# EAGLE board Dual_Drive_4 (EAGLE 9.6.2)
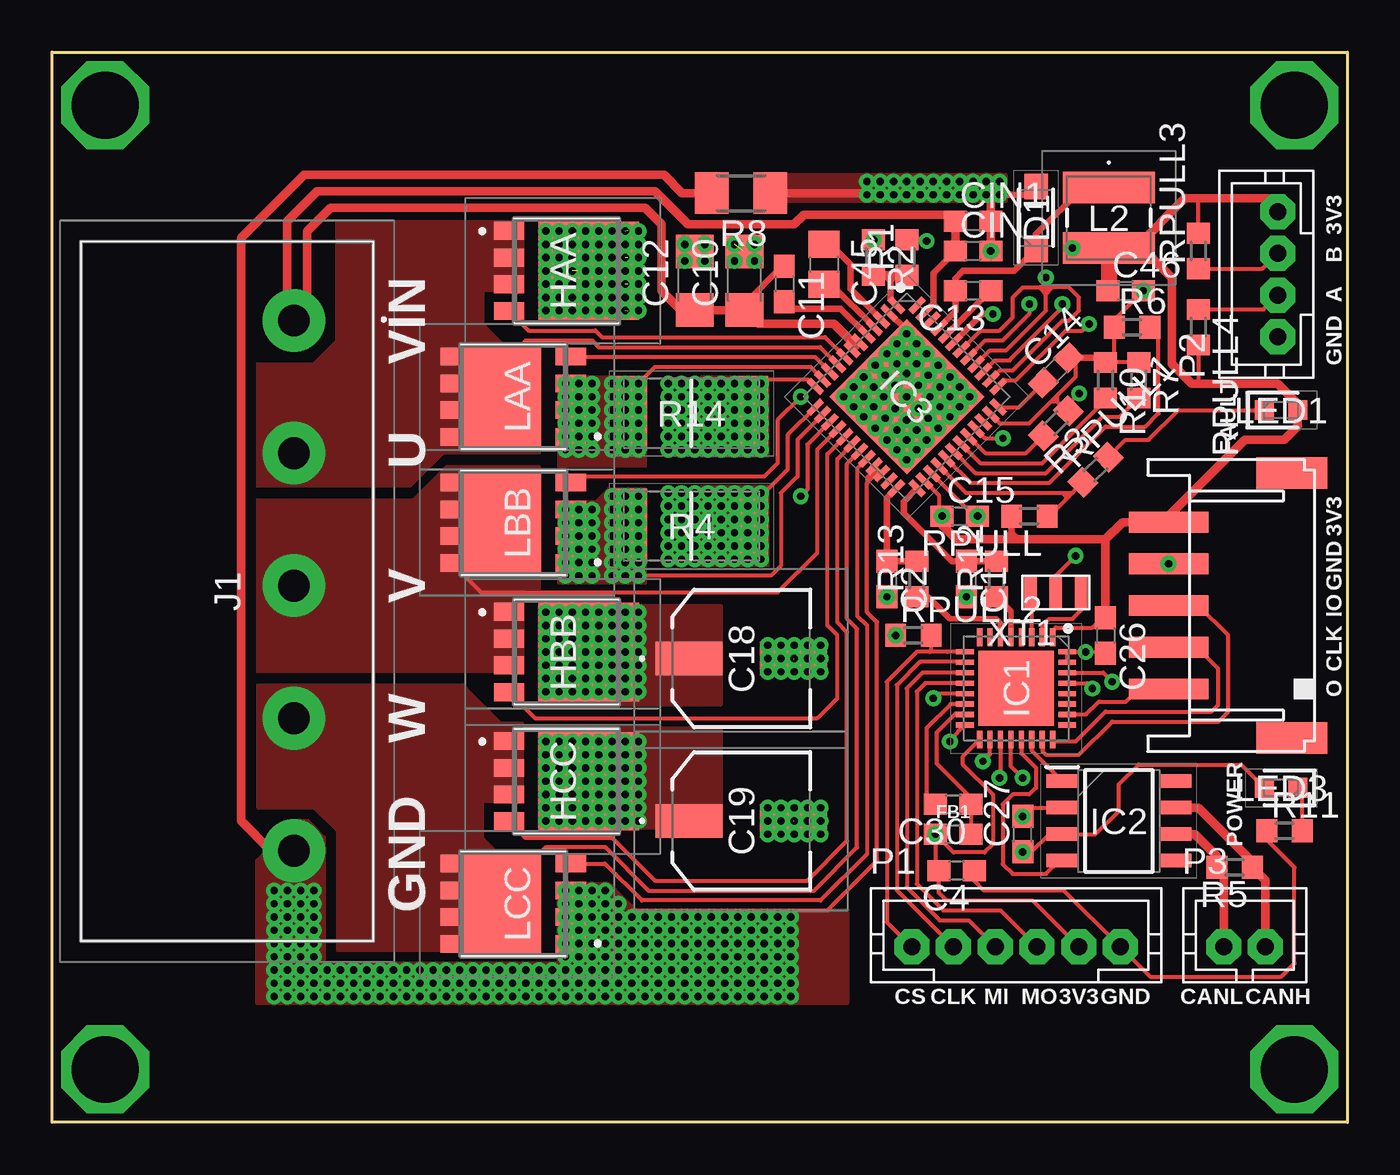
[diagram p0: board, top side]
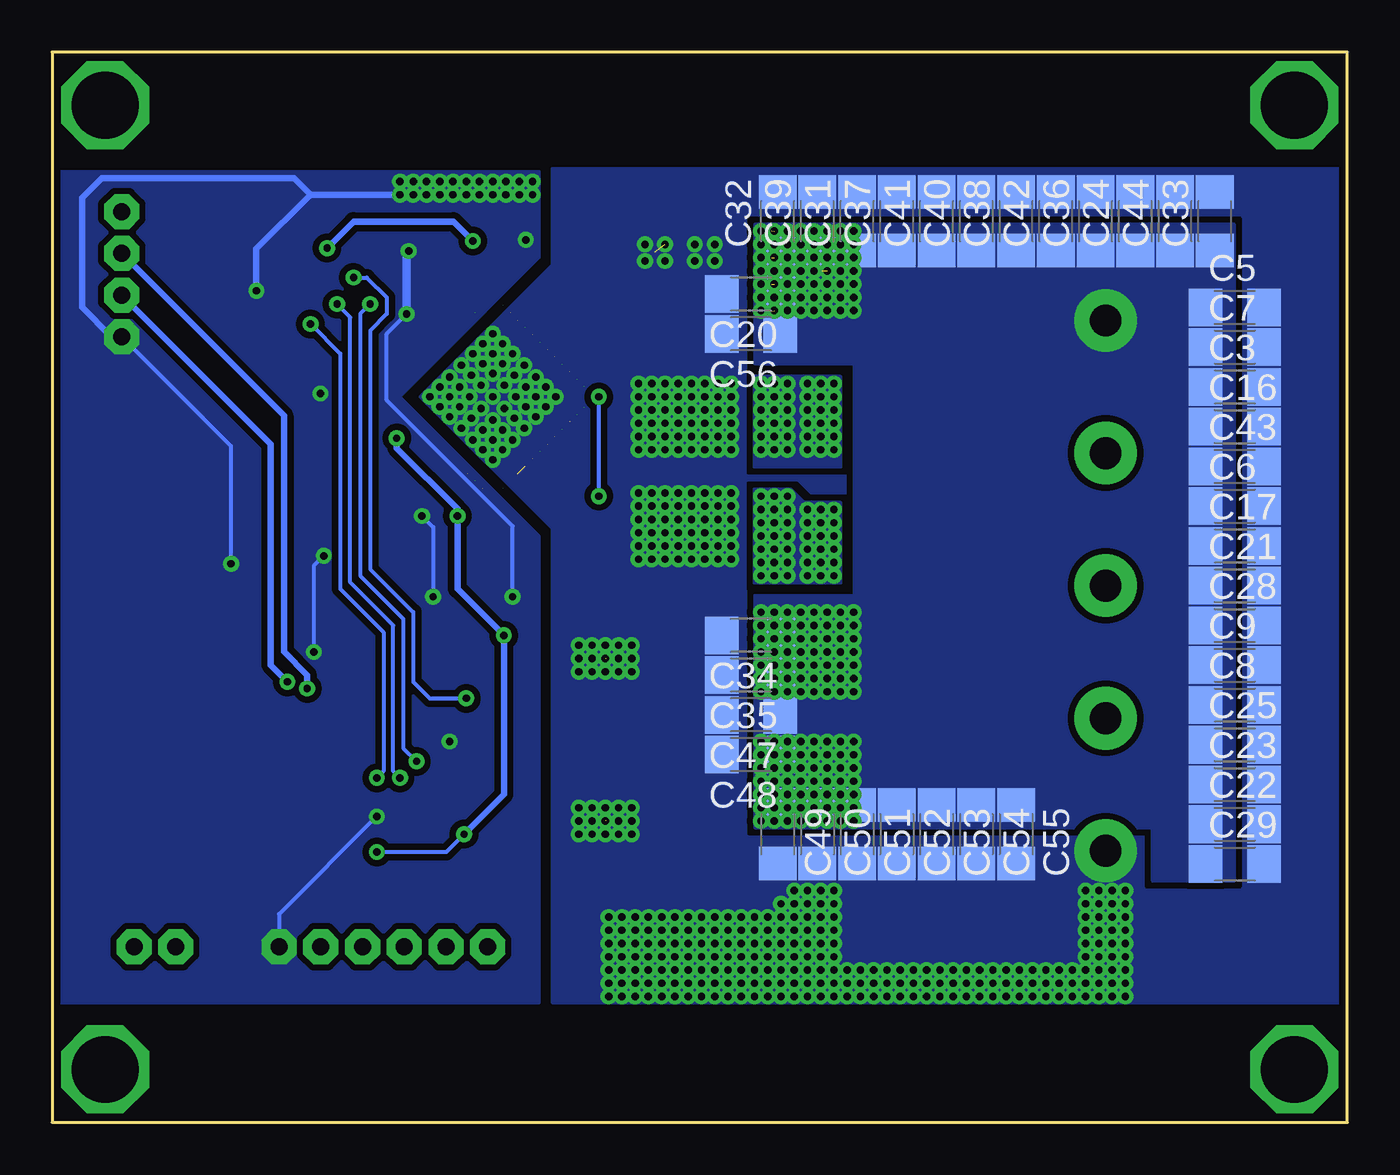
[diagram p1: board, bottom side, seen from below]

Size 62.07 x 51.28 mm. Coordinates in mm from the lower left corner, seen from the top.
Outline: 62.07,0 0,0 0,51.28 62.07,51.28 62.07,0
Copper layers (1*16): Top 0.035mm / dielectric 1.5mm / Bottom 0.035mm
Design rules "default *": minimum track width 6mil, minimum drill 0.35mm, track to track 6mil, track to pad 6mil, pad to pad 6mil, via to via 6mil, smd to smd 6mil, copper to edge 6mil, drill to drill 6mil, minimum pad ring 10mil, minimum via ring 8mil, stop-mask expansion 4mil, vias tented up to drill 15mil, thermal gap 10mil

## Footprints (pad centres in the part's own frame; a part is rotated, then mirrored left to right if it is on the bottom)
C0603 = smd 1.1 x 1: 1 -0.85,0; 2 0.85,0
C1206 = smd 1.6 x 1.8: 1 -1.4,0; 2 1.4,0
EEEHP1H4R7P = smd 1.6 x 3.2: 1 0,-2.5; 2 0,2.5
C0805 = smd 1.3 x 1.5: 1 -0.95,0; 2 0.95,0
SODFL3616X98N = smd 1.24 x 1.12: 1 -1.5,0; 2 1.5,0
0603 = smd 1.1 x 1: 1 -0.85,0; 2 0.85,0
TPHR9003NLL1Q = smd 0.85 x 1.45: 1 -1.925,-2.309; 2 -0.635,-2.309; 3 0.635,-2.309; 4 1.925,-2.309 | smd 0.85 x 1.05: 5 1.925,3.391; 6 0.635,3.391; 7 -0.635,3.391; 8 -1.925,3.391 | smd 4.7 x 3.75: 9 0,0.981
QFN50P500X500X60-33N = smd 0.85 x 0.25: 1 -2.45,1.75; 2 -2.45,1.25; 3 -2.45,0.75; 4 -2.45,0.25; 5 -2.45,-0.25; 6 -2.45,-0.75; 7 -2.45,-1.25; 8 -2.45,-1.75; 17 2.45,-1.75; 18 2.45,-1.25; 19 2.45,-0.75; 20 2.45,-0.25; 21 2.45,0.25; 22 2.45,0.75; 23 2.45,1.25; 24 2.45,1.75 | smd 0.25 x 0.85: 9 -1.75,-2.45; 10 -1.25,-2.45; 11 -0.75,-2.45; 12 -0.25,-2.45; 13 0.25,-2.45; 14 0.75,-2.45; 15 1.25,-2.45; 16 1.75,-2.45; 25 1.75,2.45; 26 1.25,2.45; 27 0.75,2.45; 28 0.25,2.45; 29 -0.25,2.45; 30 -0.75,2.45; 31 -1.25,2.45; 32 -1.75,2.45 | smd 3.6 x 3.6: 33 0,0
SOIC127P600X175-8N = smd 1.528 x 0.65: 1 -2.711,1.905; 2 -2.711,0.635; 3 -2.711,-0.635; 4 -2.711,-1.905; 5 2.711,-1.905; 6 2.711,-0.635; 7 2.711,0.635; 8 2.711,1.905
QFN50P700X700X100-49N = smd 0.9 x 0.3: 1 -3.45,2.75; 2 -3.45,2.25; 3 -3.45,1.75; 4 -3.45,1.25; 5 -3.45,0.75; 6 -3.45,0.25; 7 -3.45,-0.25; 8 -3.45,-0.75; 9 -3.45,-1.25; 10 -3.45,-1.75; 11 -3.45,-2.25; 12 -3.45,-2.75; 25 3.45,-2.75; 26 3.45,-2.25; 27 3.45,-1.75; 28 3.45,-1.25; 29 3.45,-0.75; 30 3.45,-0.25; 31 3.45,0.25; 32 3.45,0.75; 33 3.45,1.25; 34 3.45,1.75; 35 3.45,2.25; 36 3.45,2.75 | smd 0.3 x 0.9: 13 -2.75,-3.45; 14 -2.25,-3.45; 15 -1.75,-3.45; 16 -1.25,-3.45; 17 -0.75,-3.45; 18 -0.25,-3.45; 19 0.25,-3.45; 20 0.75,-3.45; 21 1.25,-3.45; 22 1.75,-3.45; 23 2.25,-3.45; 24 2.75,-3.45; 37 2.75,3.45; 38 2.25,3.45; 39 1.75,3.45; 40 1.25,3.45; 41 0.75,3.45; 42 0.25,3.45; 43 -0.25,3.45; 44 -0.75,3.45; 45 -1.25,3.45; 46 -1.75,3.45; 47 -2.25,3.45; 48 -2.75,3.45 | smd 5.25 x 5.25: 49 0,0
386006605 = drill 1.524 pad 3: 1 0,0; 2 6.35,0; 3 12.7,0; 4 19.05,0; 5 25.4,0
SRN4030HA101M = smd 4.4 x 1.5: 1 0,-1.45; 2 0,1.45
LEDC1608X55N = smd 0.9 x 0.95: 1 -0.8,0; 2 0.8,0
JST-PH6 = drill 0.813 pad 1.676 octagon: 1 5,0; 2 3,0; 3 1,0; 4 -1,0; 5 -3,0; 6 -5,0
JST-PH4 = drill 0.813 pad 1.676 octagon: 1 3,0; 2 1,0; 3 -1,0; 4 -3,0
JST-PH2 = drill 0.813 pad 1.676 octagon: 1 1,0; 2 -1,0
R0603 = smd 1 x 1.1: 1 -0.85,0; 2 0.85,0
RESC6434X90N = smd 1.55 x 3.55: 1 -2.9,0; 2 2.9,0
M1206 = smd 1.6 x 2: 1 -1.4,0; 2 1.4,0
CON-JST-PH2.0-5PIN-SMD = smd 1 x 3.8: 1 4,0; 2 2,0; 3 0,0; 4 -2,0; 5 -4,0 | smd 1.5 x 3.4: NC1 -6.35,5.9; NC2 6.35,5.9
CSTCE = smd 0.6 x 1.6: 1 -1.2,0; 2 0,0; 3 1.2,0

## Placement (x,y rotation side)
C1  3.3nF  [C0603]  43.81,26.04 270 top
C2  3.3nF  [C0603]  40.01,26.04 270 top
C3  10uF  [C1206]  5.4,35.24 0 bottom
C4  22uF  [C0603]  43.34,12.06 180 top
C5  10uF  [C1206]  5.4,39.05 0 bottom
C6  10uF  [C1206]  5.4,29.53 0 bottom
C7  10uF  [C1206]  5.4,37.15 0 bottom
C8  10uF  [C1206]  5.4,20 0 bottom
C9  10uF  [C1206]  5.4,21.91 0 bottom
C10  0.1uF  [C1206]  33.18,40.32 90 top
C11  1uF  [C0603]  35.08,40.16 270 top
C12  10uF  [C1206]  30.8,40.32 90 top
C13  0.1uF  [C0603]  44.13,39.85 180 top
C14  1uF  [C0603]  48.1,36.04 45 top
C15  0.1uF  [C0603]  43.5,29.05 0 top
C16  10uF  [C1206]  5.4,33.34 0 bottom
C17  10uF  [C1206]  5.4,27.62 0 bottom
C18  EEE-FTH101XAL  [EEEHP1H4R7P]  33.02,22.22 270 top
C19  EEE-FTH101XAL  [EEEHP1H4R7P]  33.02,14.45 270 top
C20  10uF  [C1206]  28.57,39.69 180 bottom
C21  10uF  [C1206]  5.4,25.72 0 bottom
C22  10uF  [C1206]  5.4,14.29 0 bottom
C23  10uF  [C1206]  5.4,16.19 0 bottom
C24  10uF  [C1206]  10.16,43.18 90 bottom
C25  10uF  [C1206]  5.4,18.1 0 bottom
C26  0.1uF  [C0603]  50.48,23.34 270 top
C27  0.1uF  [C0603]  46.51,13.81 90 top
C28  10uF  [C1206]  5.4,23.81 0 bottom
C29  10uF  [C1206]  5.4,12.38 0 bottom
C30  0.1uF  [C0603]  43.18,15.24 180 top
C31  10uF  [C1206]  23.5,43.18 90 bottom
C32  10uF  [C1206]  27.3,43.18 90 bottom
C33  10uF  [C1206]  6.35,43.18 90 bottom
C34  10uF  [C1206]  28.57,23.34 180 bottom
C35  10uF  [C1206]  28.57,21.43 180 bottom
C36  10uF  [C1206]  12.06,43.18 90 bottom
C37  10uF  [C1206]  21.59,43.18 90 bottom
C38  10uF  [C1206]  15.88,43.18 90 bottom
C39  10uF  [C1206]  25.4,43.18 90 bottom
C40  10uF  [C1206]  17.78,43.18 90 bottom
C41  10uF  [C1206]  19.68,43.18 90 bottom
C42  10uF  [C1206]  13.97,43.18 90 bottom
C43  10uF  [C1206]  5.4,31.43 0 bottom
C44  10uF  [C1206]  8.26,43.18 90 bottom
C45  47nF  [C0805]  36.99,41.12 270 top
C46  22uF  [C0603]  51.44,39.85 0 top
C47  10uF  [C1206]  28.57,19.53 180 bottom
C48  10uF  [C1206]  28.57,17.62 180 bottom
C49  10uF  [C1206]  27.3,13.81 270 bottom
C50  10uF  [C1206]  25.4,13.81 270 bottom
C51  10uF  [C1206]  23.5,13.81 270 bottom
C52  10uF  [C1206]  21.59,13.81 270 bottom
C53  10uF  [C1206]  19.68,13.81 270 bottom
C54  10uF  [C1206]  17.78,13.81 270 bottom
C55  10uF  [C1206]  15.88,13.81 270 bottom
C56  10uF  [C1206]  28.57,37.78 180 bottom
CIN  1uF  [C0603]  44.13,41.75 0 top
CIN1  1uF  [C0603]  44.13,43.18 0 top
D1  MBR1H100SFT3G  [SODFL3616X98N]  47.15,43.34 90 top
FB1  600r  [0603]  43.18,13.81 0 top
HAA  TPH2R506PL,L1Q  [TPHR9003NLL1Q]  24.21,40.8 270 top
HBB  TPH2R506PL,L1Q  [TPHR9003NLL1Q]  24.21,22.54 270 top
HCC  TPH2R506PL,L1Q  [TPHR9003NLL1Q]  24.21,16.35 270 top
IC1  STM32G491KEU6  [QFN50P500X500X60-33N]  46.2,20.8 270 top
IC2  TCAN332GD  [SOIC127P600X175-8N]  51.12,14.45 0 top
IC3  DRV8323RHRGZR  [QFN50P700X700X100-49N]  40.96,34.77 315 top
J1  38600-6605  [386006605]  11.59,38.42 270 top
L2  SRN4030HA-101M  [SRN4030HA101M]  50.64,43.34 180 top
LAA  TPH2R506PL,L1Q  [TPHR9003NLL1Q]  22.54,34.77 90 top
LBB  TPH2R506PL,L1Q  [TPHR9003NLL1Q]  22.54,28.73 90 top
LCC  TPH2R506PL,L1Q  [TPHR9003NLL1Q]  22.54,10.48 90 top
LED1  LTST-C191KRKT  [LEDC1608X55N]  58.9,34.13 0 top
LED3  LTST-C191KRKT  [LEDC1608X55N]  58.9,16.03 180 top
P1  [JST-PH6]  46.2,8.41 0 top
P2  [JST-PH4]  58.74,40.64 90 top
P3  [JST-PH2]  57.15,8.41 0 top
R1  33k  [R0603]  40.96,41.43 90 top
R2  10k  [R0603]  39.37,41.43 270 top
R3  47k  [R0603]  48.1,33.5 225 top
R4  0.01  [RESC6434X90N]  30.64,28.57 180 top
R5  60  [R0603]  56.67,12.22 180 top
R6  47k  [R0603]  51.75,38.1 0 top
R7  75k  [R0603]  52.07,35.56 270 top
R8  0  [M1206]  33.02,44.53 180 top
R10  75k  [R0603]  50.48,35.56 270 top
R11  510  [R0603]  59.05,13.97 0 top
R12  56  [R0603]  45.24,26.04 90 top
R13  56  [R0603]  41.43,26.04 90 top
R14  0.01  [RESC6434X90N]  30.64,33.97 180 top
RPULL  10k  [R0603]  46.83,29.05 180 top
RPULL1  330  [R0603]  50.01,31.27 45 top
RPULL2  10k  [R0603]  41.27,23.34 0 top
RPULL3  10k  [R0603]  54.93,41.75 90 top
RPULL4  10k  [R0603]  54.93,38.1 270 top
U$3  CON-JST-PH2.0-5PIN-SMD  [CON-JST-PH2.0-5PIN-SMD]  53.5,24.77 270 top
XT1  CSTCE  [CSTCE]  48.1,25.4 180 top

## Library data of the parts
C1 C2 C26 C27 C30 = rcl; SPICEPREFIX: C
C3-C17 C20-C25 C28 C29 C31-C56 CIN CIN1 = projectieie; SPICEPREFIX: C
C18 C19 = EEE-FTH101XAL; DESCRIPTION: Aluminum Electrolytic Capacitors - SMD 50VDC 100uF 20% 6x8mm AEC-Q200; HEIGHT: mm; MANUFACTURER_NAME: Panasonic; MANUFACTURER_PART_NUMBER: EEE-FTH101XAL; MOUSER_PART_NUMBER: 667-EEE-FTH101XAL; MOUSER_PRICE-STOCK: https://www.mouser.co.uk/ProductDetail/Panasonic/EEE-FTH101XAL?qs=vmHwEFxEFR%252BNutcOP%252Bqsmw%3D%3D
D1 = MBR1H100SFT3G; ARROW_PART_NUMBER: MBR1H100SFT3G; ARROW_PRICE-STOCK: https://www.arrow.com/en/products/mbr1h100sft3g/on-semiconductor; DESCRIPTION: Diode Schottky 100V 1A SOD123FL ON Semiconductor MBR1H100SFT3G Schottky Diode, 1A, 100V, 2-Pin SOD-123FL; HEIGHT: 0.98mm; MANUFACTURER_NAME: ON Semiconductor; MANUFACTURER_PART_NUMBER: MBR1H100SFT3G; MOUSER_PART_NUMBER: 863-MBR1H100SFT3G; MOUSER_PRICE-STOCK: https://www.mouser.co.uk/ProductDetail/ON-Semiconductor/MBR1H100SFT3G?qs=0n%252BW%2FEG%252BKm6mjS2tdY4y%2FA%3D%3D
FB1 = SparkFun-Coils; PROD_ID: NDUC-13805
HAA HBB HCC LAA LBB LCC = TPH2R506PL_L1Q; ARROW_PART_NUMBER: TPH2R506PL,L1Q; ARROW_PRICE-STOCK: https://www.arrow.com/en/products/tph2r506pll1q/toshiba; DESCRIPTION: MOSFET N-Ch 60V 4180pF 60nC 160A 132W; HEIGHT: 1mm; MANUFACTURER_NAME: Toshiba; MANUFACTURER_PART_NUMBER: TPH2R506PL,L1Q; MOUSER_PART_NUMBER: 757-TPH2R506PLL1Q; MOUSER_PRICE-STOCK: https://www.mouser.co.uk/ProductDetail/Toshiba/TPH2R506PLL1Q?qs=bUPhaerQQeFGJjj6SxbPEQ%3D%3D
IC1 = STM32G491KEU6; ARROW_PART_NUMBER: STM32G491KEU6; ARROW_PRICE-STOCK: https://www.arrow.com/en/products/stm32g491keu6/stmicroelectronics?region=nac; DESCRIPTION: MCU 32-bit ARM Cortex M4 RISC 512KB Flash 1.8V/2.5V/3.3V 32-Pin UFQFPN EP Tray; HEIGHT: 0.6mm; MANUFACTURER_NAME: STMicroelectronics; MANUFACTURER_PART_NUMBER: STM32G491KEU6; MOUSER_PART_NUMBER: 511-STM32G491KEU6; MOUSER_PRICE-STOCK: https://www.mouser.co.uk/ProductDetail/STMicroelectronics/STM32G491KEU6?qs=eP2BKZSCXI6Ifx0U7HNJyA%3D%3D
IC2 = TCAN332GD; ARROW_PART_NUMBER: TCAN332GD; ARROW_PRICE-STOCK: https://www.arrow.com/en/products/tcan332gd/texas-instruments?region=nac; DESCRIPTION: 3.3-V CAN Transceivers with CAN FD (Flexible Data Rate); HEIGHT: 1.75mm; MANUFACTURER_NAME: Texas Instruments; MANUFACTURER_PART_NUMBER: TCAN332GD; MOUSER_PART_NUMBER: 595-TCAN332GD; MOUSER_PRICE-STOCK: https://www.mouser.co.uk/ProductDetail/Texas-Instruments/TCAN332GD?qs=n%252BTO0c4TDSYoXh39%2FoLTXQ%3D%3D
IC3 = projectieie; ARROW_PART_NUMBER: DRV8323RHRGZR; ARROW_PRICE-STOCK: https://www.arrow.com/en/products/drv8323rhrgzr/texas-instruments; DESCRIPTION: 60V Three-Phase Smart Gate Driver With Buck Regulator and Three Current Shunt Amplifiers; HEIGHT: 1mm; MANUFACTURER_NAME: Texas Instruments; MANUFACTURER_PART_NUMBER: DRV8323RHRGZR; MOUSER_PART_NUMBER: 595-DRV8323RHRGZR; MOUSER_PRICE-STOCK: https://www.mouser.co.uk/ProductDetail/Texas-Instruments/DRV8323RHRGZR?qs=Mv7BduZupUj%2FALPfD5cVcg%3D%3D
J1 = 38600-6605; DESCRIPTION: Barrier Terminal Blocks SR BTS CS PC 5ASYCP; HEIGHT: 12.7mm; MANUFACTURER_NAME: Molex; MANUFACTURER_PART_NUMBER: 38600-6605; MOUSER_PART_NUMBER: 538-38600-6605; MOUSER_PRICE-STOCK: https://www.mouser.com/Search/Refine.aspx?Keyword=538-38600-6605
L2 = SRN4030HA-101M; DESCRIPTION: Ind,4x4x3mm,100uH+/-20%,0.55A,150C,shd; HEIGHT: 3mm; MANUFACTURER_NAME: Bourns; MANUFACTURER_PART_NUMBER: SRN4030HA-101M
LED1 LED3 = LTST-C191KRKT; ARROW_PART_NUMBER: LTST-C191KRKT; ARROW_PRICE-STOCK: https://www.arrow.com/en/products/ltst-c191krkt/lite-on-technology; DESCRIPTION: Standard LEDs - SMD Red Clear 631nm; HEIGHT: 0.55mm; MANUFACTURER_NAME: Lite-On; MANUFACTURER_PART_NUMBER: LTST-C191KRKT; MOUSER_PART_NUMBER: 859-LTST-C191KRKT; MOUSER_PRICE-STOCK: https://www.mouser.co.uk/ProductDetail/Lite-On/LTST-C191KRKT?qs=BAIUz4Y8PJBLfOhzue0q%252BA%3D%3D
P1-P3 = jst-ph
R1 R2 RPULL RPULL1-RPULL4 = projectieie; SPICEPREFIX: R
R3 R5-R8 R10-R13 = rcl; SPICEPREFIX: R
R4 R14 = CRA2512-FZ-R010ELF; ARROW_PART_NUMBER: CRA2512-FZ-R010ELF; ARROW_PRICE-STOCK: https://www.arrow.com/en/products/cra2512-fz-r010elf/bourns; DESCRIPTION: Bourns CRA Series High Power Surface Mount Resistor 2512 Case 10m +/-1% 3W +/-75ppm/C; HEIGHT: 0.9mm; MANUFACTURER_NAME: Bourns; MANUFACTURER_PART_NUMBER: CRA2512-FZ-R010ELF; MOUSER_PART_NUMBER: 652-CRA2512FZR010ELF; MOUSER_PRICE-STOCK: https://www.mouser.co.uk/ProductDetail/Bourns/CRA2512-FZ-R010ELF?qs=WqWCsLCZBkoNPiv%2FXVnYvw%3D%3D
U$3 = con-jst-ph2.0
XT1 = sc_usercreated

## Nets
3.3V: C4.2 C15.1 C26.1 C27.1 C46.1 FB1.1 IC1.1 IC1.17 IC2.3 IC3.26 IC3.33 L2.2 LED1.2 LED3.2 P1.2 P2.1 R1.2 RPULL2.1 RPULL3.2 RPULL4.2 RPULL.2 U$3.5
3.3VA: C30.1 FB1.2 IC1.15
24V: C3.1 C5.1 C6.1 C7.1 C8.1 C9.1 C10.1 C11.1 C12.1 C16.1 C17.1 C18.1 C19.1 C20.1 C21.1 C22.1 C23.1 C24.1 C25.1 C28.1 C29.1 C31.1 C32.1 C33.1 C34.1 C35.1 C36.1 C37.1 C38.1 C39.1 C40.1 C41.1 C42.1 C43.1 C44.1 C47.1 C48.1 C49.1 C50.1 C51.1 C52.1 C53.1 C54.1 C55.1 C56.1 CIN1.1 CIN.1 HAA.5 HAA.6 HAA.7 HAA.8 HAA.9 HBB.5 HBB.6 HBB.7 HBB.8 HBB.9 HCC.5 HCC.6 HCC.7 HCC.8 HCC.9 IC3.6 IC3.7 IC3.47 J1.1
AGND: C30.2 IC1.14
BAT-: C3.2 C5.2 C6.2 C7.2 C8.2 C9.2 C10.2 C12.2 C16.2 C17.2 C18.2 C19.2 C20.2 C21.2 C22.2 C23.2 C24.2 C25.2 C28.2 C29.2 C31.2 C32.2 C33.2 C34.2 C35.2 C36.2 C37.2 C38.2 C39.2 C40.2 C41.2 C42.2 C43.2 C44.2 C47.2 C48.2 C49.2 C50.2 C51.2 C52.2 C53.2 C54.2 C55.2 C56.2 IC3.2 IC3.12 IC3.13 IC3.21 IC3.22 IC3.49 J1.5 LCC.1 LCC.2 LCC.3 R4.1 R8.2 R14.1
CAL: IC3.34
CANH: IC2.7 P3.1 R5.1
CANL: IC2.6 P3.2 R5.2
CB: C13.1 IC3.44
CLK_MAG: IC1.10 P1.5
CPH: C45.2 IC3.4
CPL: C45.1 IC3.3
CS_MAG: IC1.9 P1.6 RPULL2.2
DVDD: C14.1 IC3.36
ENABLE: IC1.13 IC3.38 IC3.40 IC3.42
ENC_A: IC1.30 P2.3 RPULL4.1
ENC_B: IC1.29 P2.2 RPULL3.1
FB: IC3.1 R1.1 R2.2
FDCAN_RX: IC1.21 IC2.4
FDCAN_TX: IC1.22 IC2.1
GAIN: IC3.32 R3.2
GHA: HAA.4 IC3.8
GHB: HBB.4 IC3.17
GHC: HCC.4 IC3.18
GLA: IC3.10 LAA.4
GLB: IC3.15 LBB.4
GLC: IC3.20 LCC.4
GND: C1.2 C2.2 C4.1 C14.2 C15.2 C26.2 C27.2 C46.2 CIN1.2 CIN.2 D1.2 IC1.16 IC1.31 IC1.32 IC2.2 IC3.27 IC3.35 IC3.43 P1.1 P2.4 R2.1 R3.1 R6.1 R7.1 R8.1 R10.1 R11.1 U$3.4 XT1.2
IDRIVE: IC3.30 R7.2
LEDFAULT: LED1.1 RPULL1.2
LP_SOA: IC1.5 R12.1
LP_SOB: IC1.6 R13.1
MISO_MAG: IC1.11 P1.4
MODE: IC3.29 R6.2
MOSI_MAG: IC1.12 P1.3
N$9: IC1.3 XT1.3
N$10: LED3.1 R11.2
N$11: IC1.2 XT1.1
NFAULT: IC3.28 RPULL1.1 RPULL.1
PHASEA: HAA.1 HAA.2 HAA.3 IC3.9 J1.2 LAA.5 LAA.6 LAA.7 LAA.8 LAA.9
PHASEB: HBB.1 HBB.2 HBB.3 IC3.16 J1.3 LBB.5 LBB.6 LBB.7 LBB.8 LBB.9
PHASEC: HCC.1 HCC.2 HCC.3 IC3.19 J1.4 LCC.5 LCC.6 LCC.7 LCC.8 LCC.9
PWMA: IC1.20 IC3.37
PWMB: IC1.19 IC3.39
PWMC: IC1.18 IC3.41
SOA: C1.1 IC3.25 R12.2
SOB: C2.1 IC3.24 R13.2
SOC: IC3.23
SPA: IC3.11 LAA.1 LAA.2 LAA.3 R14.2
SPB: IC3.14 LBB.1 LBB.2 LBB.3 R4.2
SW: C13.2 D1.1 IC3.45 L2.1
SWCLK: IC1.24 U$3.2
SWIO: IC1.23 U$3.3
SWO: IC1.26 U$3.1
VCP: C11.2 IC3.5
VDS: IC3.31 R10.2

## Tracks (layer width: path | path; a pad name or v marks a point on that pad's centre or on a via)
3.3V  (via drill 0.35)  (1 unrouted)
  Top 0.203: IC3.33 44.71,32.78 v45.56,32.78 | IC3.26 42.49,30.05 42.49,29.21 C15.1 | IC1.1 47.95,23.56 48.09,23.71 49.85,23.71 50.22,24.08 50.32,24.19 | 50.16,24.19 50.32,24.19 | 50.32,24.19 C26.1 | P1.2 46.97,10.64 42.86,10.64 42.49,11.01 C4.2 42.33,12.22 FB1.1 43.2,12.94 44.69,12.94 45.09,13.33 45.09,15.72 43.66,17.14 43.66,17.56 IC1.17 | C27.1 46.93,12.96 47.78,13.81 IC2.3 50.01,13.81 51.12,14.92 51.12,16.19 52.07,17.14 56.98,17.14 LED3.2 | 53.85,28.76 U$3.5 | RPULL3.2 54.93,44.27 | RPULL4.2 54.93,35.4
  Top 0.305: R1.2 41.85,42.28 v41.91,42.23 | 50.67,24.53 50.22,24.08 | RPULL.2 45.98,28.26 | 45.98,28.2 45.98,28 46.04,27.94 | 45.98,28.26 45.98,28.2 | 45.98,28.2 45.72,27.94 | 45.98,28.26 46.3,27.94 46.35,27.94 | 45.98,28.26 45.66,27.94 45.56,27.94 | 50.64,41.27 L2.2 v48.9,41.89
  Top 0.406: P2.1 58.26,44.12 58.26,44.27 54.93,44.27 54.29,44.27 51.91,41.89 L2.2 52.25,41.89 53.66,40.48 53.66,36.35 54.61,35.4 54.93,35.4 58.74,35.4 59.7,34.44 LED1.2 59.7,33.34 59.05,32.7 57.15,32.7 53.5,29.05 U$3.5 51.31,28.76 50.48,27.94 | C15.1 42.65,28.63 43.34,27.94 45.56,27.94 45.72,27.94 46.04,27.94 46.35,27.94 50.48,27.94 | C26.1 50.48,27.94
  Top 0.762: C46.1 50.64,39.9 50.64,41.27
  Bottom 0.203: 42.65,29.39 C15.1 | C27.1 43.18,12.96 FB1.1
  Bottom 0.305: v41.91,42.23 42.84,43.16 47.62,43.16 v48.9,41.89 | FB1.1 40.42,15.72 RPULL2.1 42.65,25.56 C15.1 | v45.56,32.78 45.56,32.31 42.65,29.39
  other vias: 40.42,23.34 42.65,29.05 42.33,13.81 46.51,12.96
3.3VA
  Top 0.203: IC1.15 43.71,19.58 43.3,19.58 42.39,18.67 42.39,17.2 44.03,15.56 C30.1 FB1.2
24V  (via drill 0.35)  (8 unrouted)
  Top 0.203: C10.1 33.18,39.21 | C11.1 34.98,41.01
  Top 0.305: IC3.7 38.52,37.21 IC3.6 | 34.98,41.01 33.18,39.21 | IC3.47 42.23,39.22 42.23,40.7 CIN.1
  Top 0.406: 38.52,37.21 | 38.52,37.21 37.47,38.26 33.84,38.26 C10.1 C12.1 30.13,38.92 29.21,39.85 29.21,43.02 28.42,43.81 13.34,43.81 12.22,42.7 12.22,39.05 J1.1 11.27,38.73 11.27,43.18 12.7,44.61 28.89,44.61 30.48,43.02 35.56,43.02 36.04,43.5 42.97,43.5 CIN1.1 CIN.1
  other vias: 23.65,42.7 24.29,42.7 24.92,42.7 25.56,42.7 26.19,42.7 26.83,42.7 27.46,42.7 28.1,42.7 23.65,42.07 24.29,42.07 24.92,42.07 25.56,42.07 26.19,42.07 26.83,42.07 27.46,42.07 28.1,42.07 23.65,41.43 24.29,41.43 24.92,41.43 25.56,41.43 26.19,41.43 26.83,41.43 27.46,41.43 28.1,41.43 23.65,40.8 24.29,40.8 24.92,40.8 25.56,40.8 26.19,40.8 26.83,40.8 27.46,40.8 28.1,40.8 23.65,40.16 24.29,40.16 24.92,40.16 25.56,40.16 26.19,40.16 26.83,40.16 27.46,40.16 28.1,40.16 23.65,39.53 24.29,39.53 24.92,39.53 25.56,39.53 26.19,39.53 26.83,39.53 27.46,39.53 28.1,39.53 23.65,38.89 24.29,38.89 24.92,38.89 25.56,38.89 26.19,38.89 26.83,38.89 27.46,38.89 28.1,38.89 23.65,24.45 24.29,24.45 24.92,24.45 25.56,24.45 26.19,24.45 26.83,24.45 27.46,24.45 28.1,24.45 23.65,23.81 24.29,23.81 24.92,23.81 25.56,23.81 26.19,23.81 26.83,23.81 27.46,23.81 28.1,23.81 23.65,23.18 24.29,23.18 24.92,23.18 25.56,23.18 26.19,23.18 26.83,23.18 27.46,23.18 28.1,23.18 23.65,22.54 24.29,22.54 24.92,22.54 25.56,22.54 26.19,22.54 26.83,22.54 27.46,22.54 28.1,22.54 23.65,21.91 24.29,21.91 24.92,21.91 25.56,21.91 26.19,21.91 26.83,21.91 27.46,21.91 28.1,21.91 23.65,21.27 24.29,21.27 24.92,21.27 25.56,21.27 26.19,21.27 26.83,21.27 27.46,21.27 28.1,21.27 23.65,20.64 24.29,20.64 24.92,20.64 25.56,20.64 26.19,20.64 26.83,20.64 27.46,20.64 28.1,20.64 23.65,18.26 24.29,18.26 24.92,18.26 25.56,18.26 26.19,18.26 26.83,18.26 27.46,18.26 28.1,18.26 23.65,17.62 24.29,17.62 24.92,17.62 25.56,17.62 26.19,17.62 26.83,17.62 27.46,17.62 28.1,17.62 23.65,16.99 24.29,16.99 24.92,16.99 25.56,16.99 26.19,16.99 26.83,16.99 27.46,16.99 28.1,16.99 23.65,16.35 24.29,16.35 24.92,16.35 25.56,16.35 26.19,16.35 26.83,16.35 27.46,16.35 28.1,16.35 23.65,15.72 24.29,15.72 24.92,15.72 25.56,15.72 26.19,15.72 26.83,15.72 27.46,15.72 28.1,15.72 23.65,15.08 24.29,15.08 24.92,15.08 25.56,15.08 26.19,15.08 26.83,15.08 27.46,15.08 28.1,15.08 23.65,14.45 24.29,14.45 24.92,14.45 25.56,14.45 26.19,14.45 26.83,14.45 27.46,14.45 28.1,14.45
  pour Top (no thermals): 23.34,24.77 23.34,20 32.07,20 32.07,24.77
  pour Top (no thermals): 23.34,18.89 23.34,14.13 32.07,14.13 32.07,18.89
  pour Bottom (isolate 0.305, no thermals): 5.4,43.02 28.42,43.02 28.42,36.35 23.65,36.35 23.65,25.24 28.42,25.24 28.42,14.13 9.37,14.13 9.37,11.59 5.4,11.59
AGND
  Top 0.203: IC1.14 43.06,20.05 41.91,18.89 41.91,15.66 C30.2 42.17,15.4
BAT-  (via drill 0.35)  (8 unrouted)
  Top 0.203: IC3.12 36.26,35.58 33.99,35.58 33.54,35.13 R14.1 | IC3.13 35.24,32.94 35.24,31.27 33.54,29.57 R4.1 | v27.78,9.84 27.78,10.16 37.15,10.16 39.53,12.54 39.53,23.97 39.05,24.45 39.05,30.64 | IC3.21 39.51,31.33 | 39.51,31.33 IC3.22 39.5,31.09 39.05,30.64 | 39.51,31.33 39.05,30.88 39.05,30.64
  Top 0.305: IC3.2 40.96,37.95 v40.96,37.78 IC3.49 | C12.2 30.45,42.07 v30.32,42.07
  Top 0.406: J1.5 10.48,13.02 9.05,14.45 9.05,42.39 12.06,45.4 29.31,45.4 30.19,44.53 R8.2
  other vias: 24.61,11.11 24.61,10.48 24.61,9.84 24.61,9.21 24.61,8.57 25.24,11.11 25.24,10.48 25.24,9.84 25.24,9.21 25.24,8.57 25.88,8.57 25.88,9.21 25.88,9.84 25.88,10.48 25.88,11.11 26.51,11.11 26.51,10.48 26.51,9.84 26.51,9.21 26.51,8.57 27.15,8.57 27.15,9.21 27.15,9.84 27.15,10.48 27.78,9.21 27.78,8.57 33.97,35.4 33.97,34.77 33.97,34.13 33.97,33.5 33.97,32.86 33.97,32.23 33.34,35.4 33.34,34.77 33.34,34.13 33.34,33.5 33.34,32.86 33.34,32.23 32.7,35.4 32.7,34.77 32.7,34.13 32.7,33.5 32.7,32.86 32.7,32.23 32.07,35.4 32.07,34.77 32.07,34.13 32.07,33.5 32.07,32.86 32.07,32.23 32.7,30.16 32.7,29.53 32.7,28.89 32.7,28.26 32.7,27.62 32.7,26.99 32.07,30.16 32.07,29.53 32.07,28.89 32.07,28.26 32.07,27.62 32.07,26.99 33.97,30.16 33.97,29.53 33.97,28.89 33.97,28.26 33.97,27.62 33.97,26.99 33.34,30.16 33.34,29.53 33.34,28.89 33.34,28.26 33.34,27.62 33.34,26.99 31.43,30.16 31.43,29.53 31.43,28.89 31.43,28.26 31.43,27.62 31.43,26.99 31.43,35.4 31.43,34.77 31.43,34.13 31.43,33.5 31.43,32.86 31.43,32.23 24.61,7.94 24.61,7.3 25.24,7.94 25.24,7.3 25.88,7.3 25.88,7.94 26.51,7.94 26.51,7.3 27.15,7.3 27.15,7.94 27.78,7.94 27.78,7.3 24.61,6.67 24.61,6.03 25.24,6.67 25.24,6.03 25.88,6.03 25.88,6.67 26.51,6.67 26.51,6.03 27.15,6.03 27.15,6.67 27.78,6.67 27.78,6.03 20.8,7.3 21.43,7.3 22.07,7.3 22.7,7.3 23.34,7.3 23.97,7.3 20.8,6.67 20.8,6.03 21.43,6.67 21.43,6.03 22.07,6.03 22.07,6.67 22.7,6.67 22.7,6.03 23.34,6.03 23.34,6.67 23.97,6.67 23.97,6.03 16.99,7.3 17.62,7.3 18.26,7.3 18.89,7.3 19.53,7.3 20.16,7.3 16.99,6.67 16.99,6.03 17.62,6.67 17.62,6.03 18.26,6.03 18.26,6.67 18.89,6.67 18.89,6.03 19.53,6.03 19.53,6.67 20.16,6.67 20.16,6.03 13.18,7.3 13.81,7.3 14.45,7.3 15.08,7.3 15.72,7.3 16.35,7.3 13.18,6.67 13.18,6.03 13.81,6.67 13.81,6.03 14.45,6.03 14.45,6.67 15.08,6.67 15.08,6.03 15.72,6.03 15.72,6.67 16.35,6.67 16.35,6.03 10.64,7.3 11.27,7.3 11.91,7.3 12.54,7.3 10.64,6.67 10.64,6.03 11.27,6.67 11.27,6.03 11.91,6.03 11.91,6.67 12.54,6.67 12.54,6.03 10.64,9.21 11.27,9.21 11.91,9.21 12.54,9.21 10.64,8.57 10.64,7.94 11.27,8.57 11.27,7.94 11.91,7.94 11.91,8.57 12.54,8.57 12.54,7.94 10.64,11.11 11.27,11.11 11.91,11.11 12.54,11.11 10.64,10.48 10.64,9.84 11.27,10.48 11.27,9.84 11.91,9.84 11.91,10.48 12.54,10.48 12.54,9.84 28.42,9.84 28.42,9.21 28.42,8.57 29.05,9.84 29.05,9.21 29.05,8.57 29.69,8.57 29.69,9.21 29.69,9.84 30.32,9.84 30.32,9.21 30.32,8.57 30.96,8.57 30.96,9.21 30.96,9.84 31.59,9.84 31.59,9.21 31.59,8.57 28.42,7.94 28.42,7.3 29.05,7.94 29.05,7.3 29.69,7.3 29.69,7.94 30.32,7.94 30.32,7.3 30.96,7.3 30.96,7.94 31.59,7.94 31.59,7.3 28.42,6.67 28.42,6.03 29.05,6.67 29.05,6.03 29.69,6.03 29.69,6.67 30.32,6.67 30.32,6.03 30.96,6.03 30.96,6.67 31.59,6.67 31.59,6.03 32.23,9.84 32.23,9.21 32.23,8.57 32.86,9.84 32.86,9.21 32.86,8.57 33.5,8.57 33.5,9.21 33.5,9.84 34.13,9.84 34.13,9.21 34.13,8.57 34.77,8.57 34.77,9.21 34.77,9.84 35.4,9.84 35.4,9.21 35.4,8.57 32.23,7.94 32.23,7.3 32.86,7.94 32.86,7.3 33.5,7.3 33.5,7.94 34.13,7.94 34.13,7.3 34.77,7.3 34.77,7.94 35.4,7.94 35.4,7.3 32.23,6.67 32.23,6.03 32.86,6.67 32.86,6.03 33.5,6.03 33.5,6.67 34.13,6.67 34.13,6.03 34.77,6.03 34.77,6.67 35.4,6.67 35.4,6.03 30.8,35.4 30.8,34.77 30.8,34.13 30.8,33.5 30.8,32.86 30.8,32.23 30.16,35.4 30.16,34.77 30.16,34.13 30.16,33.5 30.16,32.86 30.16,32.23 29.53,35.4 29.53,34.77 29.53,34.13 29.53,33.5 29.53,32.86 29.53,32.23 30.8,30.16 30.8,29.53 30.8,28.89 30.8,28.26 30.8,27.62 30.8,26.99 30.16,30.16 30.16,29.53 30.16,28.89 30.16,28.26 30.16,27.62 30.16,26.99 29.53,30.16 29.53,29.53 29.53,28.89 29.53,28.26 29.53,27.62 29.53,26.99 40.96,34.77 37.94,34.77 40.96,31.75 43.97,34.77 38.42,35.24 40.01,36.83 38.89,35.72 39.45,36.27 40.48,37.31 38.42,34.29 38.89,33.81 41.43,37.31 41.91,36.83 43.5,35.24 43.02,35.72 42.47,36.27 43.5,34.29 43.02,33.81 41.43,32.23 41.91,32.7 40.48,32.23 40.01,32.7 39.45,33.26 42.47,33.26 40.48,36.35 41.43,36.35 40.96,36.83 40.96,35.88 38.89,34.77 39.37,35.24 39.37,34.29 40.96,32.7 40.48,33.18 41.43,33.18 39.85,34.77 40.96,33.66 43.02,34.77 42.55,34.29 42.55,35.24 42.07,34.77 39.93,33.73 40.4,34.21 41.99,35.8 41.51,35.32 39.93,35.8 40.4,35.32 41.99,33.73 41.51,34.21 34.29,22.22 34.92,22.22 35.56,22.22 36.2,22.22 36.83,22.22 34.29,22.86 34.92,22.86 35.56,22.86 36.2,22.86 36.83,22.86 34.29,21.59 34.92,21.59 35.56,21.59 36.2,21.59 36.83,21.59 34.29,14.45 34.29,13.81 34.29,15.08 34.92,15.08 35.56,15.08 36.2,15.08 36.83,15.08 34.92,14.45 35.56,14.45 36.2,14.45 36.83,14.45 34.92,13.81 35.56,13.81 36.2,13.81 36.83,13.81 30.32,41.28 31.27,41.28 31.27,42.07 32.7,42.07 33.66,42.07 33.66,41.28 32.7,41.28
  pour Top (no thermals): 31.11,35.72 34.29,35.72 34.29,31.91 31.11,31.91
  pour Top (no thermals): 31.11,30.48 34.29,30.48 34.29,26.67 31.11,26.67
  pour Top (no thermals): 9.84,12.54 11.75,14.45 12.22,14.45 13.02,13.65 13.02,7.62 24.29,7.62 24.29,11.43 26.67,11.43 27.94,10.16 38.1,10.16 38.1,5.71 9.84,5.71
  pour Bottom (isolate 0.305, rank 3, no thermals): 0.32,45.72 0.32,5.71 38.1,5.71 38.1,28.42 44.45,34.77 38.1,41.12 38.1,45.72
CANH
  Top 0.406: IC2.7 54.93,15.08 57.52,12.48 R5.1 58.15,11.6 P3.1
CANL
  Top 0.406: IC2.6 54.77,13.81 55.82,12.76 R5.2 56.15,11.9 P3.2
CB
  Top 0.305: IC3.44 C13.1
CLK_MAG
  Top 0.203: IC1.10 43.73,22.07 41.59,22.07 40.48,20.95 40.48,11.13 P1.5
CPH  (1 unrouted)
  Top 0.305: IC3.4 37.33,40.17 C45.2
CPL  (1 unrouted)
  Top 0.305: IC3.3 38.26,39.94 38.26,41.11 37.31,42.07 C45.1
CS_MAG
  Top 0.203: IC1.9 42.91,22.55 42.91,22.54 42.07,22.54 | 42.07,22.54 41.43,22.54 40.01,21.11 40.01,9.6 P1.6 | RPULL2.2 42.12,22.6 42.07,22.54
DVDD
  Top 0.203: IC3.36 46.34,34.27 C14.1
ENABLE  (via drill 0.35)
  Top 0.203: IC3.38 45.41,36.04 46.04,36.04 48.42,38.42 48.74,38.42 49.21,38.89 49.21,39.53 48.74,40 47.94,40 | IC3.40 44.95,36.99 45.72,36.99 47.62,38.89 47.62,39.69 | IC3.42 44.49,37.94 45.4,37.94 46.04,38.58 46.04,39.53 46.51,40 47.31,40 | 47.31,40 47.62,39.69 | 47.94,40 47.78,40 | 47.78,40 47.62,40 | 47.62,40 47.47,40 | 47.47,40 47.31,40 | 47.62,39.69 47.62,39.85 47.78,40 | 47.62,39.69 47.94,40 | 47.62,40 47.62,40.16 | 47.62,40.16 v47.62,40.48 | 47.47,40 47.62,40.16 | 47.78,40 47.62,40.16 | IC1.13 42.45,20.55 v42.23,20.32
  Bottom 0.203: v47.62,40.48 46.99,40.48 46.04,39.53 46.04,38.73 46.83,37.94 46.83,26.51 44.77,24.45 44.77,21.11 43.97,20.32 v42.23,20.32
ENC_A  (via drill 0.35)
  Top 0.203: IC1.30 50.37,21.55 v50.8,21.11 | RPULL4.1 58.05,38.95 P2.3
  Bottom 0.305: v50.8,21.11 51.59,21.91 51.59,32.5 P2.3
ENC_B  (via drill 0.35)
  Top 0.203: IC1.29 49.6,21.05 v49.85,20.8 | RPULL3.1 58,40.9 P2.2
  Bottom 0.305: v49.85,20.8 49.85,21.43 50.96,22.54 50.96,33.86 P2.2
FB  (1 unrouted)
  Top 0.305: IC3.1 40.16,39.45 40.16,40.32 | 40.16,40.32 40.16,40.64 | 40.48,40.64 40.9,40.64 R1.1 | 40.48,40.64 40.16,40.64 | 40.16,40.64 39.85,40.64 | 39.85,40.64 39.43,40.64 R2.2 | 40.48,40.64 40.16,40.32 | 40.16,40.32 39.85,40.64
FDCAN_RX
  Top 0.203: 47.93,12.54 48.26,12.54 | 48.26,12.54 IC2.4 | 48.26,12.54 47.62,11.91 46.04,11.91 45.56,12.38 45.56,15.24 46.04,15.72 46.83,15.72 47.15,16.03 47.15,16.99 46.45,17.69 IC1.21
FDCAN_TX
  Top 0.203: IC2.1 46.95,17.81 IC1.22
GAIN
  Top 0.203: IC3.32 44.72,32.07 46.67,32.07 R3.2
GHA  (1 unrouted)
  Top 0.203: IC3.8 37.04,37.62 26.35,37.62 26.04,37.94 22.83,37.94 HAA.4
GHB  (1 unrouted)
  Top 0.203: HBB.4 23.15,19.37 36.67,19.37 37.62,20.32 37.62,23.34 37.15,23.81 37.15,32.02 IC3.17
GHC  (1 unrouted)
  Top 0.203: HCC.4 22.67,13.65 26.83,13.65 28.89,11.59 36.2,11.59 38.1,13.49 38.1,23.49 37.62,23.97 37.62,31.79 IC3.18
GLA  (1 unrouted)
  Top 0.203: IC3.10 36.58,36.67 24.87,36.67 LAA.4
GLB  (via drill 0.35)  (1 unrouted)
  Top 0.203: LBB.4 25.26,30.66 25.56,30.96 34.13,30.96 34.77,31.59 34.77,33.65 v35.88,34.77 | 37.26,33.56 IC3.15 36.2,32.48 36.2,30.32 v35.88,30
  Bottom 0.203: v35.88,34.77 v35.88,30
GLC  (1 unrouted)
  Top 0.203: LCC.4 26.49,12.4 28.26,10.64 36.83,10.64 39.05,12.86 39.05,23.81 38.58,24.29 38.58,31.32 IC3.20
GND  (via drill 0.35)  (1 unrouted)
  Top 0.203: R7.1 R10.1 50.53,36.46 50.9,36.83 R6.1 50.9,38.46 v52.28,39.85 | IC3.35 45.41,33.5 46.83,33.5 47.86,34.53 | C14.2 49.05,36.29 49.05,35.72 48.18,34.85 | 47.86,34.53 48.02,34.69 | 48.02,34.69 48.18,34.85 | IC3.27 44.2,29.05 C15.2 | XT1.2 48.1,26.19 v49.05,27.15 | C27.2 46.93,15.08 IC2.2 | C4.1 44.19,11.59 44.66,11.11 48.5,11.11 P1.1 52.62,6.98 58.9,6.98 59.53,7.62 59.53,12.22 58.2,13.55 R11.1 | IC1.32 48.65,22.49 | IC1.31 IC1.32 | IC1.32 v49.53,22.54 50.43,22.54 C26.2 | 53.12,27.15 U$3.4 | 48.18,34.53 48.61,34.1 R3.1 48.7,34.41 v49.21,34.92 | 48.02,34.69 48.18,34.53 | 48.18,34.53 48.18,34.85 | 48.18,34.53 47.86,34.53 | IC1.16 43.02,18.32 v43.02,18.26
  Top 0.305: D1.2 46.76,44.45 v45.4,44.45 | 44.98,44.23 v44.77,44.45 | IC3.43 44.57,38.73 v45.09,38.73 45.09,38.79 | C14.2 50.36,36.64 50.53,36.46
  Top 0.406: R8.1 38.97,44.53 v39.05,44.45 | CIN.2 CIN1.2 44.98,44.23
  Bottom 0.203: v49.05,27.15 49.53,26.67 v49.53,22.54 | C15.2 43.81,28.52 C1.2 | C2.2 40.01,28.57 46.04,34.61 46.04,37.78 v45.09,38.73 | U$3.4 53.5,32.4 P2.4 | C27.2 51.2,9.98 P1.1
  Bottom 0.305: v45.4,44.45 49.69,44.45 | v52.28,39.85 52.28,41.85 49.69,44.45 | 49.69,44.45 50.48,45.24 59.69,45.24 60.64,44.29 60.64,39.05 59.23,37.64 P2.4
  Bottom 0.406: CIN.2 45.09,41.65 v45.09,38.73
  other vias: 39.37,42.28 39.05,45.08 39.69,45.08 39.69,44.45 40.32,45.08 40.32,44.45 40.96,44.45 40.96,45.08 41.59,45.08 41.59,44.45 42.23,45.08 42.23,44.45 42.86,44.45 42.86,45.08 43.5,45.08 43.5,44.45 44.13,44.45 44.13,45.08 44.77,45.08 45.4,45.08 44.98,41.75 44.35,29.05 40.01,25.18 43.81,25.18 53.5,26.77 46.51,14.66
  pour Top (no thermals): 33.81,45.4 33.81,44.13 45.72,44.13 45.72,45.4
  pour Bottom (isolate 0.305, no thermals): 38.73,45.56 38.73,41.43 45.4,34.77 38.73,28.1 38.73,5.71 61.91,5.71 61.91,45.56
IDRIVE
  Top 0.203: IC3.30 44.26,31.11 47.62,31.11 50.32,33.81 51.17,33.81 R7.2
LEDFAULT
  Top 0.203: RPULL1.2 51.44,32.7 52.55,32.7 53.98,34.13 LED1.1
LP_SOA
  Top 0.254: R12.1 45.95,24.48 IC1.5
LP_SOB
  Top 0.254: IC1.6 45.45,23.93 45.24,24.13 43.02,24.13 41.97,25.18 R13.1
MISO_MAG
  Top 0.203: IC1.11 41.71,21.55 40.96,20.8 40.96,11.27 42.55,9.68 43.93,9.68 P1.4
MODE
  Top 0.203: IC3.29 44.02,30.64 47.78,30.64 50.48,33.34 52.39,33.34 53.02,33.97 53.02,37.68 R6.2
MOSI_MAG
  Top 0.203: IC1.12 41.84,21.05 41.43,20.64 41.43,11.43 42.7,10.16 45.45,10.16 P1.3
N$1  (via drill 3.2)
  other vias: 2.54,48.74
N$2  (via drill 3.2)
  other vias: 2.54,2.54
N$3  (via drill 3.2)
  other vias: 59.53,2.54
N$4  (via drill 3.2)
  other vias: 59.53,48.74
N$9
  Top 0.203: IC1.3 46.95,25.35 XT1.3
N$10
  Top 0.203: R11.2 59.91,15.82 LED3.1
N$11
  Top 0.203: IC1.2 47.45,23.79 47.78,24.13 48.9,24.13 49.3,24.54 XT1.1
NFAULT
  Top 0.203: IC3.28 43.79,30.16 48.42,30.16 | RPULL1.1 48.9,30.16 | 48.42,30.16 48.58,30.16 | 48.58,30.16 48.9,30.16 | 48.9,30.16 48.58,29.84 | 48.58,29.84 47.78,29.05 RPULL.1 | 48.58,30 48.58,30.16 | 48.42,30.16 48.58,30 | 48.58,30 48.58,29.84
PHASEA  (1 unrouted)
  Top 0.203: LAA.9 21.56,36.33 22.7,37.46 25.88,37.46 26.19,37.15 36.81,37.15 IC3.9
  pour Top (isolate 0.203, no thermals): 22.54,39.85 20.64,39.85 20.64,38.26 23.34,35.56 23.34,32.07 18.73,32.07 17.14,30.48 9.84,30.48 9.84,36.35 12.54,36.35 13.65,37.47 13.65,43.18 22.54,43.18
PHASEB  (1 unrouted)
  Top 0.203: LBB.8 20.56,25.4 34.77,25.4 36.67,27.3 36.67,32.25 IC3.16
  pour Top (isolate 0.203, no thermals): 23.34,31.43 23.34,25.56 22.54,25.56 22.54,21.59 9.84,21.59 9.84,29.84 17.3,29.84 18.89,31.43
PHASEC  (1 unrouted)
  Top 0.203: LCC.9 21.56,11.08 23.65,13.18 26.51,13.18 28.57,11.11 36.51,11.11 38.58,13.18 38.58,23.65 38.1,24.13 38.1,31.55 IC3.19
  pour Top (isolate 0.203, no thermals): 22.54,19.13 21.51,19.13 19.68,20.95 9.84,20.95 9.84,15.08 12.54,15.08 13.65,13.97 13.65,8.25 23.34,8.25 23.34,10.95 20.64,13.65 20.64,15.4 22.54,15.4
PWMA  (via drill 0.35)
  Top 0.203: IC3.37 45.64,35.56 46.2,35.56 48.58,37.94 49.37,37.94 v49.69,38.26 | v46.51,16.51 45.95,17.08 IC1.20
  Bottom 0.203: v49.69,38.26 48.26,36.83 48.26,25.56 46.2,23.49 46.2,16.83 v46.51,16.51
PWMB  (via drill 0.35)
  Top 0.203: IC3.39 45.18,36.51 45.88,36.51 48.42,39.05 v48.42,39.21 | IC1.19 45.45,16.55 v45.4,16.51
  Bottom 0.203: v45.4,16.51 45.72,16.83 45.72,23.81 47.78,25.88 47.78,38.58 v48.42,39.21
PWMC  (via drill 0.35)
  Top 0.203: IC3.41 44.72,37.46 45.56,37.46 46.83,38.73 v46.83,39.21 | v44.61,17.3 44.95,17.64 IC1.18
  Bottom 0.203: v46.83,39.21 47.31,38.73 47.31,26.19 45.24,24.13 45.24,17.94 v44.61,17.3
SOA  (1 unrouted)
  Top 0.305: IC3.25 40.82,29.75 40.82,29.19 43.12,26.88 C1.1 R12.2
SOB  (1 unrouted)
  Top 0.305: IC3.24 40.01,29.92 C2.1 R13.2
SPA  (via drill 0.35)  (1 unrouted)
  Top 0.203: R14.2 27.74,35.04 28.89,36.19 36.35,36.19 IC3.11
  other vias: 24.61,35.4 24.61,34.77 25.24,34.77 24.61,34.13 24.61,33.5 24.61,32.86 25.24,35.4 25.24,34.13 25.24,33.5 25.24,32.86 27.46,35.4 27.46,34.77 28.1,34.77 27.46,34.13 27.46,33.5 27.46,32.86 28.1,35.4 28.1,34.13 28.1,33.5 28.1,32.86 24.61,32.23 25.24,32.23 28.1,32.23 27.46,32.23 25.88,35.4 25.88,34.77 25.88,34.13 25.88,33.5 25.88,32.86 25.88,32.23 26.83,32.23 26.83,32.86 26.83,33.5 26.83,34.13 26.83,34.77 26.83,35.4
  pour Top (isolate 0.203, no thermals): 24.29,35.72 28.42,35.72 28.42,31.43 24.29,31.43
  pour Bottom (isolate 0.203, no thermals): 24.29,31.43 24.29,35.72 28.42,35.72 28.42,31.43
SPB  (via drill 0.35)  (1 unrouted)
  Top 0.203: IC3.14 35.72,32.71 35.72,30.96 34.92,30.16 34.92,26.67 34.45,26.19 v28.1,26.19
  other vias: 24.61,29.37 24.61,28.73 24.61,28.1 24.61,27.46 24.61,26.83 24.61,26.19 25.24,29.37 25.24,28.73 25.24,28.1 25.24,27.46 25.24,26.83 27.46,30 28.1,29.37 27.46,29.37 27.46,28.73 28.1,28.73 28.1,28.1 27.46,28.1 28.1,27.46 27.46,27.46 28.1,26.83 27.46,26.83 27.46,26.19 25.24,26.19 28.1,30 25.88,29.37 25.88,28.73 25.88,28.1 25.88,27.46 25.88,26.83 25.88,26.19 26.83,26.19 26.83,26.83 26.83,27.46 26.83,28.1 26.83,28.73 26.83,29.37 26.83,30
  pour Top (isolate 0.203, no thermals): 24.29,29.69 24.29,25.88 28.42,25.88 28.42,30.32 26.67,30.32 26.04,29.69
  pour Bottom (isolate 0.203, no thermals): 24.29,29.69 26.04,29.69 26.67,30.32 28.42,30.32 28.42,25.88 24.29,25.88
SW
  Top 0.305: IC3.45 43.28,38.86 C13.2 43.28,40.42 43.66,40.8 46.11,40.8 D1.1 47.15,42.54 49.39,44.79 L2.1
SWCLK
  Top 0.203: IC1.24 48.04,18.26 49.05,18.26 50.48,19.68 55.56,19.68 55.88,20 55.88,21.75 54.86,22.76 U$3.2
SWIO
  Top 0.203: IC1.23 47.47,18.33 47.47,17.78 47.62,17.62 49.21,17.62 50.8,19.21 55.88,19.21 56.36,19.68 56.36,23.34 54.93,24.76 U$3.3
SWO
  Top 0.203: IC1.26 49.55,19.55 50.16,20.16 51.47,20.16 52.07,20.76 U$3.1
VCP  (1 unrouted)
  Top 0.305: C11.2 35.4,39 37.79,39 IC3.5
VDS
  Top 0.203: IC3.31 44.49,31.59 47.47,31.59 50.48,34.61 R10.2

## Text on the board
tPlace: 3V3 | B | A | VIN | GND | FAULT | U | 3V3 | GND | V | IO | CLK | O | W | POWER | GND | CS | CLK | MI | MO | 3V3 | GND | CANL | CANH